# Altium PCB CrashDAQ For Hammond 1554H.PcbDoc (part 1 of 2)
Units mil, origin at the board's own origin, x right, y up, seen from the top; angles counter-clockwise.
Board outline 6580.35 x 4200 mil, 2 copper layers (Top Layer, Bottom Layer); 103 components, 88 nets, 462 pads, 122 vias.
Unrouted connection lines stored in the file: 5.
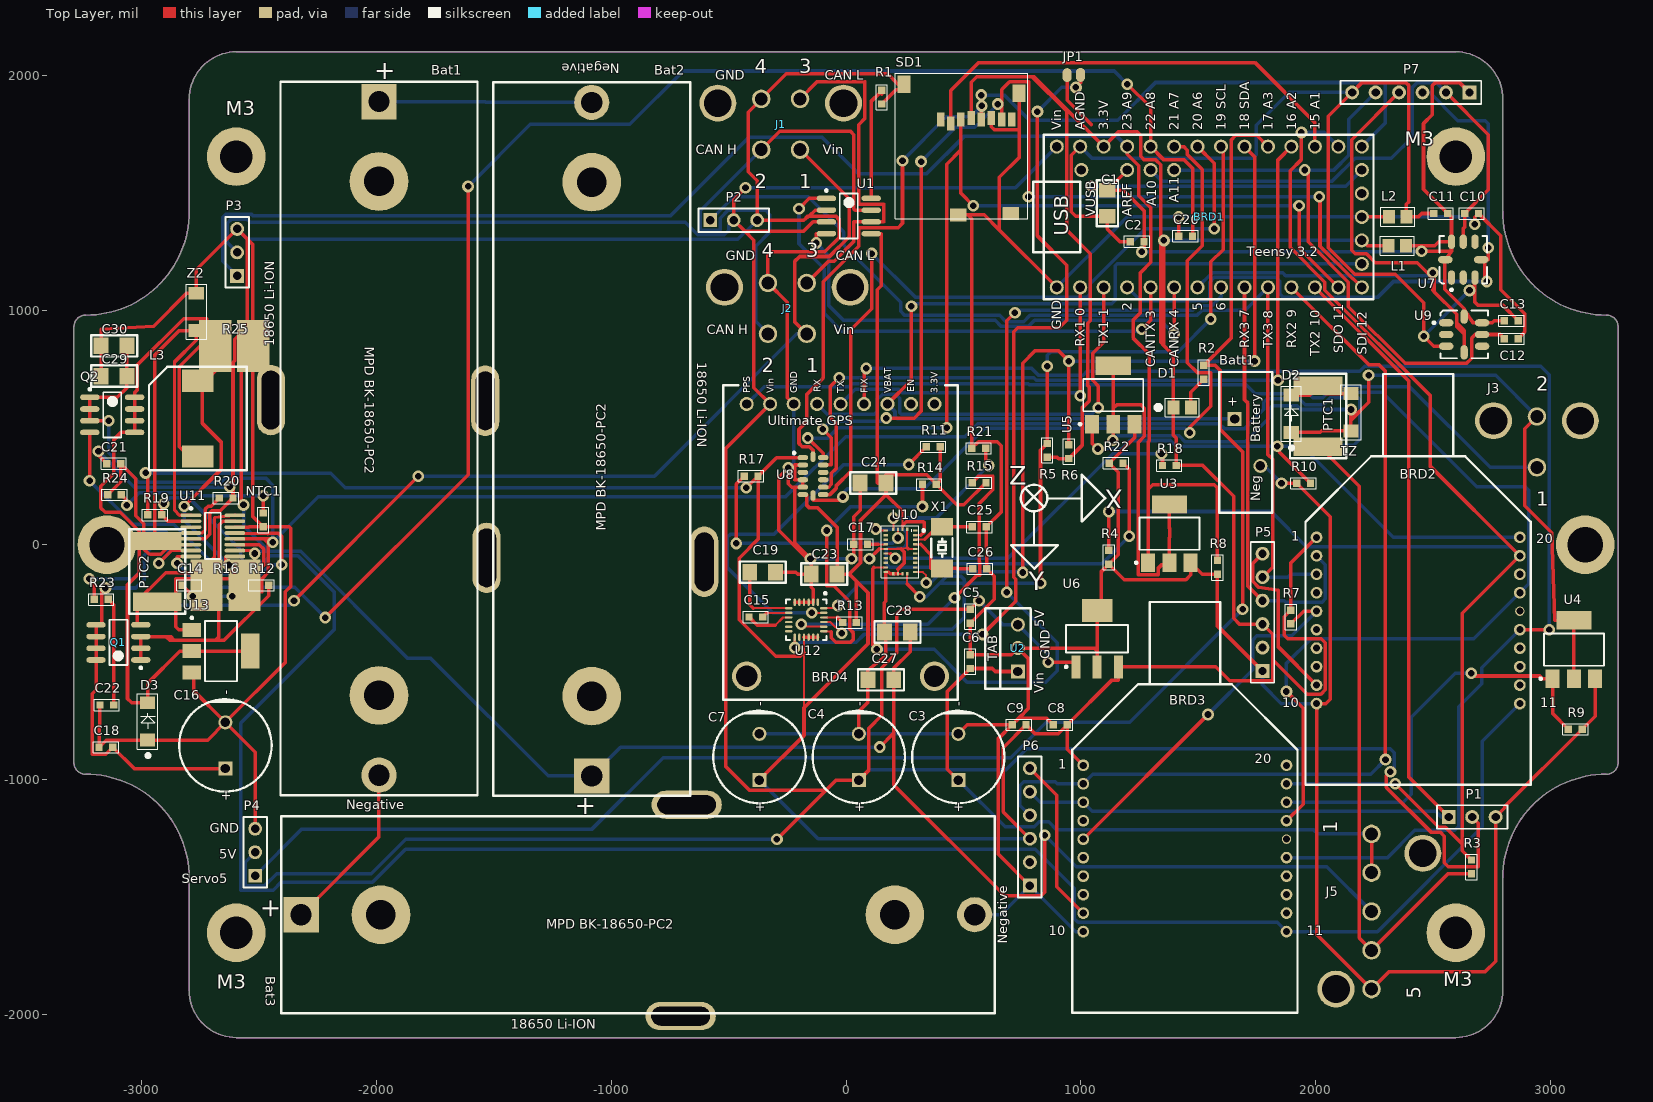
[diagram p0: Top Layer view]
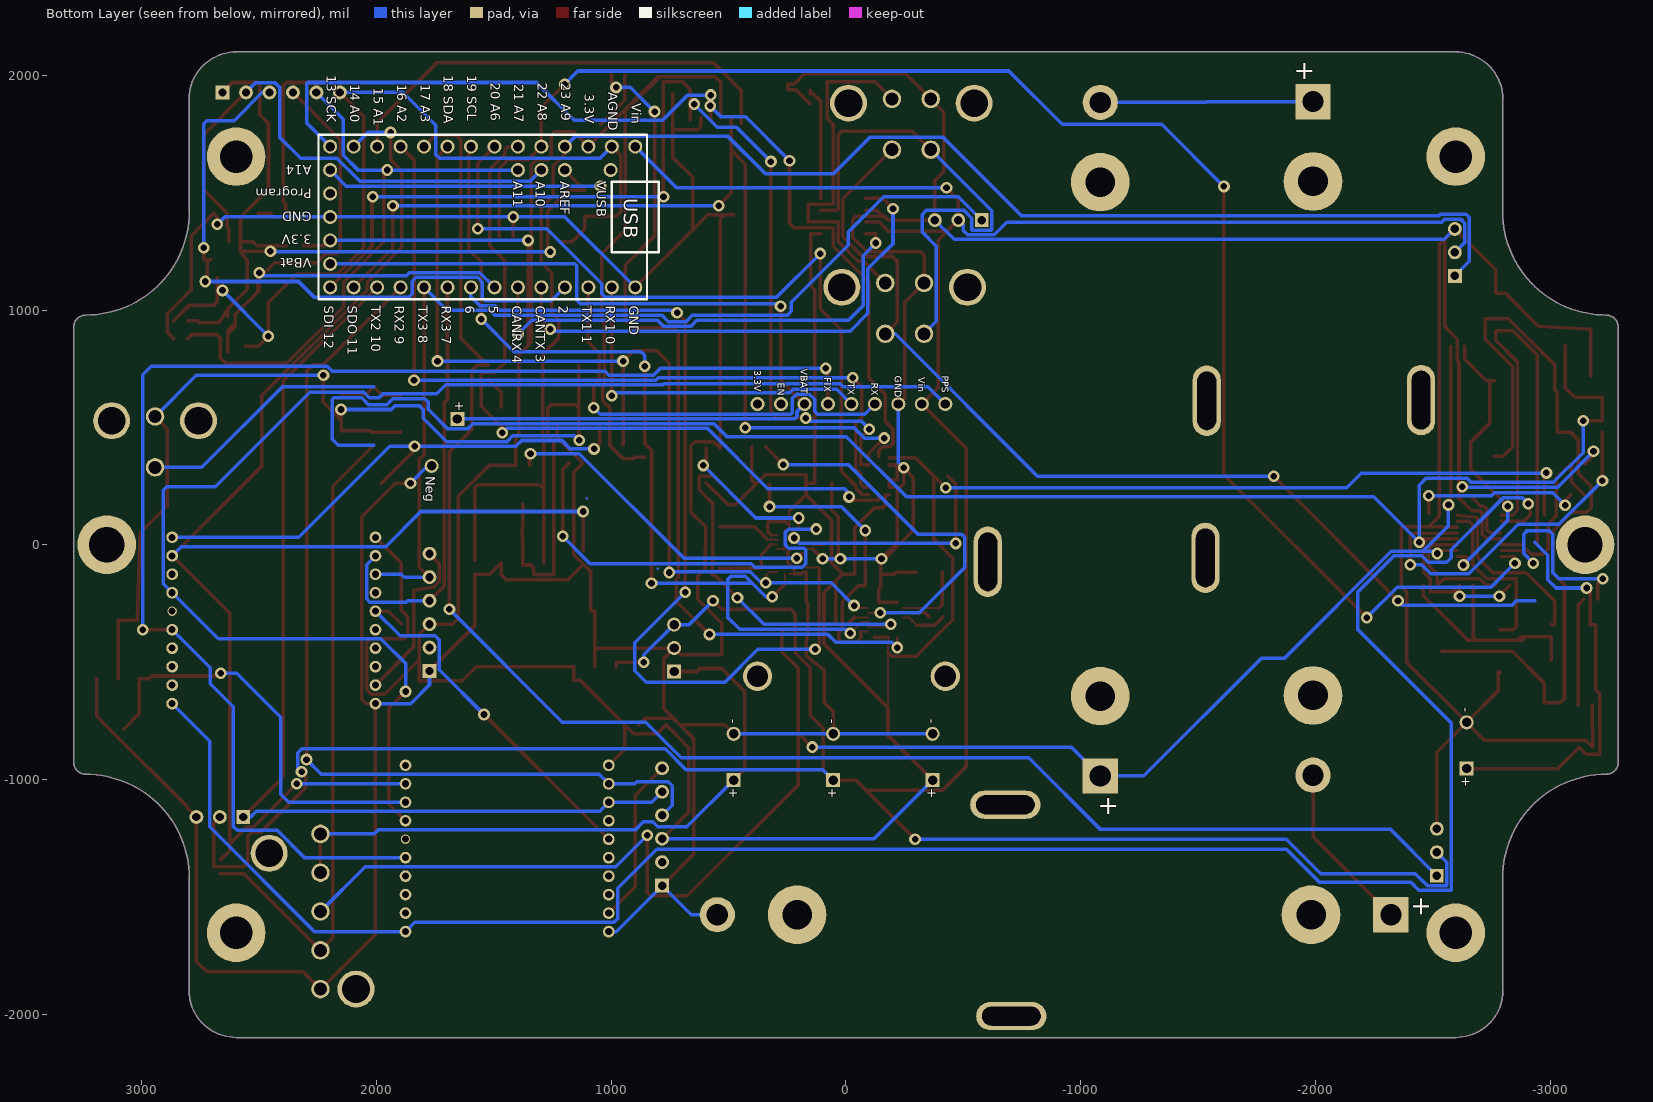
[diagram p1: Bottom Layer view, seen from below]

## Layer stack, top to bottom
Top Solder: solder mask 0.4, Solder Resist, Dk 3.5
Top Layer: signal copper 1.4
Dielectric 1: dielectric 12.6, FR-4, Dk 4.8
Bottom Layer: signal copper 1.4
Bottom Solder: solder mask 0.4, Solder Resist, Dk 3.5

## Board outline
-3240.35,-978.31 cw(c-3240.35,-928.31) -3290.35,-928.31 -3290,-928.31 -3290,928.31 cw(c-3240,928.31) -3240,978.31 ccw(c-3240,1420) -2798.31,1420 -2798.31,1900 -2798.43,1900 cw(c-2598.43,1900) -2598.43,2100 2598.43,2100 cw(c2598.43,1900) 2798.43,1900 2798.31,1900 2798.31,1420 ccw(c3240,1420) 3240,978.31 cw(c3240,928.31) 3290,928.31 3290,-928.31 cw(c3240,-928.31) 3240,-978.31 ccw(c3240,-1420) 2798.31,-1420 2798.31,-1900 2798.43,-1900 cw(c2598.43,-1900) 2598.43,-2100 -2598.78,-2100 cw(c-2598.78,-1900) -2798.78,-1900 -2798.66,-1900 -2798.66,-1420 ccw(c-3240.35,-1420)

## Design rules (kind name [scope] priority, off if disabled: settings)
Clearance [All] p1: gap=5
HoleSize [All] p1: absolutevalues=TRUE maxlimit=250 minlimit=1 maxpercent=80.000 minpercent=20.000
PolygonConnect [All] p1: connectstyle=Relief reliefconductorwidth=10 reliefentries=4 polygonreliefangle="90 Angle" airgapwidth=10
RoomDefinition TeensyCrashDAQ [InComponentClass('TeensyCrashDAQ')] p1: confinementstyle=ConfineIn formatcopy=TRUE lockcomponents=FALSE outline -4418.43,-3668.54 -2418.43,-3668.54 -2418.43,-2668.54 -4418.43,-2668.54
RoomDefinition CrashDAQSensors [InComponentClass('CrashDAQSensors')] p2: confinementstyle=ConfineIn formatcopy=TRUE lockcomponents=FALSE outline -4418.43,-3668.54 -2418.43,-3668.54 -2418.43,-2668.54 -4418.43,-2668.54
RoutingVias [All] p1: holewidth=28 width=50 viastyle="Through Hole" minholewidth=28 minwidth=50 maxholewidth=28 maxwidth=50
SMDNeckDown [All] p1: percent=90.000
SilkToSilkClearance [All] p1: silktosilkclearance=1
SolderMaskExpansion [All] p1: expansion=4
Width [All] p1: maxlimit=50 minlimit=7 preferedwidth=15
28 further rules are at their usual default settings.

## Classes and differential pairs
component class TeensyCrashDAQ: Batt1 BRD1 BRD2 BRD3 C1 C2 C3 C4 C5 C6 C7 C8 C9 D1 D2 J1 J2 J3 J5 L1 L2 P1 P2 P3 P4 P5 P6 PTC1 R1 R2 R3 R4 R5 R6 R7 R8 R9 R10 SD1 U1 U2 U3 U4 U5 U6 Z1
component class CrashDAQSensors: Bat1 Bat2 Bat3 BRD4 C10 C11 C12 C13 C14 C15 C16 C17 C18 C19 C20 C21 C22 C23 C24 C25 C26 C27 C28 C29 C30 D3 JP1 L3 NTC1 P7 PTC2 Q1 Q2 R11 R12 R13 R14 R15 R16 R17 R18 R19 R20 R21 R22 R23 R24 R25 U7 U8 U9 U10 U11 U12 U13 X1 Z2

## Components (designator, comment, footprint, x,y, rotation, side; value= is the part's Value field where it differs from the comment)
Bat1 "18650" "18650 Holder" -1083.66,449.8 r90 top
Bat2 "18650" "18650 Holder" -1990.16,452.76 r270 top
Bat3 "18650" "18650 Holder" -886.81,-1576.77 r0 top
Batt1 "CR1225FV-LF" "Coin Cell with Tabs" 1765.75,335.63 r90 top
BRD1 "Teensy 3.2" Teensy 2197.83,1096.46 r90 top
BRD2 "Xbee 2.4 GHz" Xbee 2004.92,31.5 r0 top
BRD3 "Xbee 900 MHz" Xbee 1010.83,-939.96 r0 top
BRD4 "Adafruit Ultimate GPS" GPS 376.7,679.28 r90 top
C1 "4.7uF" 1206 1113.19,1454.72 r90 top
C2 "0.1uF" 0603 1240.16,1291.34 r0 top
C3 "330uF" "Elec. Cap 5 x 10mm" 478.35,-1002.95 r90 top
C4 "330uF" "Elec. Cap 5 x 10mm" 54.63,-1002.95 r90 top
C5 "0.1uF" 0603 529.53,-305.12 r90 top
C6 "0.1uF" 0603 529.53,-498.03 r270 top
C7 "330uF" "Elec. Cap 5 x 10mm" -369.09,-1002.95 r90 top
C8 "1.0uF" 0603 912.4,-767.72 r0 top
C9 "8.2pF" 0603 737.2,-767.72 r0 top
C10 "1000pF" 0603 2665.35,1411.42 r180 top
C11 "0.1uF" 0603 2534.45,1411.2 r0 top
C12 "1000pF" 0603 2834.65,877.95 r180 top
C13 "0.1uF" 0603 2834.65,954.72 r180 top
C14 "15nF" 0603 -2798.23,-173.23 r0 top
C15 "0.22uF" 0603 -383.86,-308.07 r0 top
C16 "330uF" "Elec. Cap 5 x 10mm" -2644.68,-953.74 r90 top
C17 "1.0uF" 0603 62.01,1.97 r0 top
C18 "0.1uF" 0603 -3153.54,-863.19 r0 top
C19 "4.7uF" 1206 -355.31,-117.13 r0 top
C20 "4700pF" 0603 1446.85,1314.96 r0 top
C21 "0.47uF" 0603 -3120.08,345.47 r0 top
C22 "0.1uF" 0603 -3149.61,-683.07 r0 top
C23 "4.7uF" 1206 -93.5,-125 r0 top
C24 "4.7uF" 1206 115.16,262.8 r0 top
C25 "12 pF" 0603 567.91,75.79 r180 top
C26 "12 pF" 0603 569.88,-102.36 r180 top
C27 "10uF" 1206 148.62,-575.79 r0 top
C28 "10uF" 1206 218.5,-372.05 r0 top
C29 "10uF" 1206 -3119.09,718.5 r0 top
C30 "10uF" 1206 -3119.09,847.44 r0 top
D1 "Red" "0805 Polarized" 1430.12,584.65 r0 top
D2 "CGRA4001-G" "SMA with A and K" 1896.65,478.35 r90 top
D3 "B360A-13-F" "SMA with A and K" -2976.38,-832.68 r90 top
J1 "4 Pos Mini-Fit Jr." "4 POS Vertical MINI-FIT JR" -278.54,1899.61 r0 top
J2 "4 Pos Mini-Fit Jr." "4 POS Vertical MINI-FIT JR" -250,1115.16 r0 top
J3 "39-29-9023" "2 POS Vertical MINI-FIT JR" 2861.22,546.26 r0 top
J5 "Molex 39-30-2050" "5 POS Vert MINI-FIT JR" 2239.17,-1893.7 r90 top
JP1 "Solder Jumper" "Solder Jumper" 980.32,2000 r0 top
L1 "80 Ohms" 0805 2350.39,1273.62 r180 top
L2 "80 Ohms" 0805 2348.43,1397.64 r0 top
L3 "8.2 uH" "Inductor - 1045" -2970.47,316.93 r0 top
NTC1 "10k" 0603 -2483.27,105.32 r90 top
P1 "Header 3" HDR1X3 2567.91,-1160.43 r0 top
P2 "Header 3" HDR1X3 -578.74,1382.87 r0 top
P3 "Header 3" HDR1X3 -2594.49,1145.67 r90 top
P4 "Header 3" HDR1X3 -2517.72,-1410.43 r90 top
P5 "Header 6" HDR1X6 1774.61,-538.39 r90 top
P6 "Header 6" HDR1X6 783.46,-1452.76 r90 top
P7 "Header 6" HDR1X6 2656.5,1927.17 r180 top
PTC1 "750mA" 2920 2011.81,548.23 r90 top
PTC2 "750mA" 2920 -2935.04,-114.17 r90 top
Q1 "IRF9328" SOIC-8 -3100.39,-416.34 r180 top
Q2 "IRF9328" SOIC-8 -3126.97,553.15 r0 top
R1 "4.7k" 0603 152.56,1907.48 r90 top
R2 "500" 0603 1524.61,734.25 r90 top
R3 "180k" 0603 2665.35,-1373.03 r90 top
R4 "32.4k" 0603 1120.08,-53.15 r90 top
R5 "4.7k" 0603 857.28,401.57 r270 top
R6 "4.7k" 0603 949.8,396.65 r270 top
R7 "4.7k" 0603 1895.67,-308.07 r90 top
R8 "32.4k" 0603 1582.68,-96.46 r90 top
R9 "32.4k" 0603 3107.28,-786.42 r180 top
R10 "32.4k" 0603 1949.8,261.81 r0 top
R11 "10k" 0603 372.05,417.32 r0 top
R12 "4.7k" 0603 -2490.16,-173.23 r0 top
R13 "10k" 0603 14.76,-331.69 r0 top
R14 "10k" 0603 355.32,256.89 r0 top
R15 "10k" 0603 566.93,263.78 r0 top
R16 "0.04" 2818 -2644.19,-173.23 r0 top
R17 "10k" 0603 -404.53,292.32 r0 top
R18 "10k" 0603 1377.95,337.6 r0 top
R19 "32.4k" 0603 -2945.87,126.97 r180 top
R20 "309k" 0603 -2641.73,198.82 r0 top
R21 "4.7k" 0603 565.94,410.43 r0 top
R22 "4.7k" 0603 1150.59,347.44 r0 top
R23 "6.04k" 0603 -3173.23,-233.27 r0 top
R24 "32.4k" 0603 -3117.13,212.6 r0 top
R25 "0.025" 2818 -2606.3,846.46 r0 top
SD1 "microSD" "SD Card Holder" 219.49,1389.76 r0 top
U1 "MCP2562" SOIC-8 11.81,1400.59 r0 top
U2 "OKI-78SR" 78xx 732.28,-540.35 r90 top
U3 "NCV8403ASTT1G" ONSC-SOT-223-4-318E-04_V 1377.95,47.24 r90 top
U4 "NCV8403ASTT1G" ONSC-SOT-223-4-318E-04_V 3101.38,-446.85 r90 top
U5 "NCV8403ASTT1G" ONSC-SOT-223-4-318E-04_V 1138.78,637.8 r90 top
U6 "MCP1825ST-3302E/DB" SOT-223-DB3_M 1069.88,-400.59 r90 top
U7 "ADXL001-250" ADI-E-8-1_V 2629.92,1214.57 r90 top
U8 "ADXL375" ADI-CC-14-1_V -140.75,292.32 r0 top
U9 "ADXL001-250" ADI-E-8-1_V 2633.86,895.67 r0 top
U10 "BNO055" "BNO055 LGA" 232.28,-29.53 r270 top
U11 "LTC4006EGN-2" LT-GN-16_N -2697.83,37.4 r0 top
U12 "LSM9DS0 IMU" "LGA 4x4x1 mm 24-lead" -169.29,-319.88 r0 top
U13 "NCV8403ASTT1G" ONSC-SOT-223-4-318E-04_V -2663.39,-453.74 r0 top
X1 "32.768KHz" "XTAL 2 pad" 408.46,-101.38 r90 top
Z1 "SMA6J" SMA 2151.57,643.7 r270 top
Z2 "SMA6J" SMA -2768.7,912.4 r90 top

## Footprints (in the part's own frame and the unit in brackets; to place one, negate y for a bottom-side part, rotate by r counter-clockwise, add the part's x,y. Pads: shape width x height; smd on the part's side, far side on the other; paste and mask are expansions set on the pad)
"2 POS Vertical MINI-FIT JR" [mm] "Vertical Header 39-29-9023"
  round 4 hole 3: 0(-2.6,-0.46) 0(6.8,-0.46)
  round 2 hole 1.4: 1(2.1,-5.5) 2(2.1,0)
"4 POS Vertical MINI-FIT JR" [mm] "Vertical Header"
  round 4 hole 3: 0(-6.8,-0.46) 0(6.8,-0.46)
  round 2 hole 1.4: 1(2.1,-5.5) 2(-2.1,-5.5) 3(2.1,0) 4(-2.1,0)
"5 POS Vert MINI-FIT JR" [mm] "Molex 5 Pos Vertical Header with Pegs 39-30-2050"
  round 4 hole 3: 0(0,3.85) 0(14.7,-5.55)
  round 2 hole 1.4: 1(16.8,0) 2(12.6,0) 3(8.4,0) 4(4.2,0) 5(0,0)
78xx [mil] "Voltage regulator based on LM7805"
  rect 60x60 hole 40: 1(0,0)
  round 60 hole 40: 2(100,0) 3(200,0)
  silkscreen extent -73,-55 269,139
0603 [mm] "0603 SMP Component with outline"
  rect 0.8x0.8 smd: 1(-0.75,0) 2(0.75,0)
  silkscreen extent -1.39,-0.61 1.36,0.61
0805 [mm]
  rect 1.3x1.5 smd: 1(-0.899,0) 2(1.001,0)
  silkscreen extent -1.8,-1.02 1.9,1.02
"0805 Polarized" [mm] "Polarized 0805 with Pin 1 as Anode (+)"
  rect 1.3x1.5 smd: 1(-0.899,0) 2(1.001,0)
  silkscreen extent -2.79,-0.99 1.88,0.99
1206 [mm]
  rect 1.6x1.8 smd: 1(-1.4,0) 2(1.4,0)
  silkscreen extent -2.47,-1.16 2.5,1.15
2818 [mil] "Power Metal Strip® Resistors, High Power (7 W)  Low Value (down to 0.001 O), Surface Mount"
  rect 138x220 smd: 1(-81,0) 2(81,0)
2920 [mm] "Littlefuse PolyFues SMT 2920L Series"
  rect 2x5.3 smd: 1(-3.3,0) 2(3.3,0)
  silkscreen extent -4.57,-3.05 4.57,3.05
"18650 Holder" [mil] "MPD BK-18650-PC2 Single LI-ION Cell Holder"
  round 250 hole 126: 0(-1095,0) 0(1095,0)
  rect 150x150 hole 90: 1(-1435,0)
  round 150 hole 90: 2(1435,0)
  silkscreen extent -1520,-420 1520,420
ADI-CC-14-1_V [mm] "QFN, 14-Leads, Body 5x3mm, Pitch 0.8mm"
  oval 1.145x0.55 smd: 1(-1.098,2) 2(-1.098,1.2) 3(-1.098,0.4) 4(-1.098,-0.4) 5(-1.098,-1.2) 6(-1.098,-2) 8(1.098,-2) 9(1.098,-1.2) 10(1.098,-0.4) 11(1.098,0.4) 12(1.098,1.2) 13(1.098,2)
  oval 0.55x1.145 smd: 7(0,-2.097) 14(0,2.097)
  silkscreen extent -2.18,2.38 -1.93,2.62, body extent -1.5,-2.5 1.5,2.5, height 1
ADI-E-8-1_V [mm] "LCC, 8-Leads, Body 5x5mm, Pitch 1.27mm"
  oval 1.56x0.78 smd: 1(-1.94,1.27) 2(-1.94,0) 3(-1.94,-1.27) 5(1.94,-1.27) 6(1.94,0) 7(1.94,1.27)
  oval 0.78x1.56 smd: 4(0,-1.94) 8(0,1.94)
  silkscreen extent -3.39,-2.58 2.58,2.58, body extent -2.5,-2.5 2.5,2.5, height 2.21
"BNO055 LGA" [mm] "BOSCH BNO055  Intelligent 9-axis absolute orientation sensor"
  rect 0.25x0.475 smd: 1(-2.286,1.594) 6(-2.286,-1.594) 7(-1.786,-1.594) 8(-1.286,-1.594) 9(-0.786,-1.594) 10(-0.286,-1.594) 11(0.214,-1.594) 12(0.714,-1.594) 13(1.214,-1.594) 14(1.714,-1.594) 15(2.214,-1.594) 20(2.214,1.58) 21(1.714,1.58) 22(1.214,1.58) 23(0.714,1.58) 24(0.214,1.58) 25(-0.286,1.58) 26(-0.786,1.58) 27(-1.286,1.58) 28(-1.786,1.58)
  rect 0.375x0.25 smd paste+0: 2(-2.413,0.719)
  rect 0.375x0.25 smd: 3(-2.413,0.219) 4(-2.413,-0.281) 5(-2.413,-0.781) 16(2.413,-0.781) 17(2.413,-0.281) 18(2.413,0.219) 19(2.413,0.719)
  silkscreen extent -2.82,-2.08 2.85,2.62
"Coin Cell with Tabs" [mil] "Renata Two pins vertical mounting"
  rect 60x60 hole 40: 1(200,110.24)
  round 60 hole 40: 2(0,0)
  silkscreen extent -200,-50 400,175
"Elec. Cap 5 x 10mm" [mil] "2 lead polarized Radial Capacitor with 5 mm lead spacing and 10 mm diameter can"
  rect 60x60 hole 40: 1(0,0)
  round 60 hole 40: 2(196.85,0)
  silkscreen extent -98,-197 295,197
GPS [mil] "Adafruit Ultimate GPS Breakout"
  round 125 hole 90: 0(-1240,0) 0(-1240,800)
  round 60 hole 40: 1(-80,0) 2(-80,100) 3(-80,200) 4(-80,300) 5(-80,400) 6(-80,500) 7(-80,600) 8(-80,700) 9(-80,800)
  silkscreen extent -1340,-100 0,900
HDR1X3 [mm] "Connector; Header; 3 Position"
  rect 1.5x1.5 hole 0.9: 1(0,0)
  round 1.5 hole 0.9: 2(2.54,0) 3(5.08,0)
  silkscreen extent -1.27,-1.27 6.35,1.27
HDR1X6 [mm] "Connector; Header; 6 Position"
  rect 1.5x1.5 hole 0.9: 1(0,0)
  round 1.5 hole 0.9: 2(2.54,0) 3(5.08,0) 4(7.62,0) 5(10.16,0) 6(12.7,0)
  silkscreen extent -1.27,-1.27 13.97,1.27
"Inductor - 1045" [mm] "Wurth WE-PDF SMD Shielded Power Inductor P/N: 7447797820"
  rect 3.4x2.4 smd: 1(5.3,1.5) 2(5.3,9.7)
  silkscreen extent 0,0 10.6,11.2
"LGA 4x4x1 mm 24-lead" [mm] "QFN, 24-Leads, Body 4.1x4.1mm, Pitch 0.5mm,  IPC High Density"
  oval 0.25x0.8 smd: 1(1.25,1.9) 2(0.75,1.9) 3(0.25,1.9) 4(-0.25,1.9) 5(-0.75,1.9) 6(-1.25,1.9) 13(-1.25,-1.9) 14(-0.75,-1.9) 15(-0.25,-1.9) 16(0.25,-1.9) 17(0.75,-1.9) 18(1.25,-1.9)
  oval 0.8x0.25 smd: 7(-1.9,1.25) 8(-1.9,0.75) 9(-1.9,0.25) 10(-1.9,-0.25) 11(-1.9,-0.75) 12(-1.9,-1.25) 19(1.9,-1.25) 20(1.9,-0.75) 21(1.9,-0.25) 22(1.9,0.25) 23(1.9,0.75) 24(1.9,1.25)
  silkscreen extent -2.2,-2.2 2.2,2.97, body extent -2.05,-2.05 2.05,2.05, height 0.8
LT-GN-16_N [mm] "SOP, 16-Leads, Body 5x4mm, Pitch 0.635mm, IPC Medium Density"
  oval 2.25x0.4 smd: 1(-2.375,2.222) 2(-2.375,1.587) 3(-2.375,0.952) 4(-2.375,0.317) 5(-2.375,-0.318) 6(-2.375,-0.953) 7(-2.375,-1.588) 8(-2.375,-2.223) 9(2.375,-2.223) 10(2.375,-1.588) 11(2.375,-0.953) 12(2.375,-0.318) 13(2.375,0.317) 14(2.375,0.952) 15(2.375,1.587) 16(2.375,2.222)
  silkscreen extent -2.5,-2.5 0.85,3.1, body extent -2,-2.5 2,2.5, height 1.75
ONSC-SOT-223-4-318E-04_V [mm] "SOT223, 4-Leads, Body 6.5x3.5mm, Pitch 2.3mm"
  rect 2x1.5 smd: 1(-3.15,2.3) 2(-3.15,0) 3(-3.15,-2.3)
  rect 2x3.8 smd: 4(3.15,0)
  silkscreen extent -3.27,-3.25 1.75,3.72, body extent -1.75,-3.25 1.75,3.25, height 1.75
"SD Card Holder" [mm] "Amphenol 101-00660-68-6 CONN MICRO SD CARD PUSH-PUSH R/A"
  rect 0.8x1.5 smd: 1(4.66,10.7) 2(5.76,10.3) 3(6.86,10.7) 4(7.96,10.9) 5(9.06,10.7) 6(10.16,10.9) 7(11.26,10.7) 8(12.36,10.7)
  rect 1.4x1.9 smd: 6(0.7,14.55) 6(13.15,13.55)
  rect 1.8x1.4 smd: 6(6.55,0.4) 9(12.25,0.527)
  silkscreen extent -0.25,0 14.1,15.75
SMA [mil] "SMA with outline"
  rect 55x65 smd: 1(0,0) 2(159,0)
  silkscreen extent -38,-44 197,43
"SMA with A and K" [mil] "SMA with outline and Cathode Bar on Pin 2"
  rect 55x65 smd: 1(0,0) 2(159,0)
  silkscreen extent -71,-44 197,43
SOIC-8 [mm]
  oval 2.1x0.6 smd: 1(-2.425,1.905) 2(-2.425,0.635) 3(-2.425,-0.635) 4(-2.425,-1.905) 5(2.425,-1.905) 6(2.425,-0.635) 7(2.425,0.635) 8(2.425,1.905)
  silkscreen extent -2.55,-2.45 0.97,2.88
"Solder Jumper" [mm]
  rrect100% 1x1.5 smd: 1(-0.974,0.025) 2(0.475,0.05)
SOT-223-DB3_M [mm] "SOT223, 4-Leads, Body 6.5x3.5mm, Pitch 2.3mm, Lead Span 7mm, IPC Low Density"
  rect 2.5x1 smd: 1(-3.05,2.3) 2(-3.05,0) 3(-3.05,-2.3)
  rect 2.5x3.3 smd: 4(3.05,0)
  silkscreen extent -3.17,-3.35 1.5,3.47, body extent -1.85,-3.35 1.85,3.35, height 1.8
Teensy [mil] "32 bit Arduino Compatible Microcontroller www.pjrc.com/teensy"
  round 60 hole 40: 1(0,0) 2(0,100) 3(0,200) 4(0,300) 5(0,400) 6(0,500) 7(0,600) 8(0,700) 9(0,800) 10(0,900) 11(0,1000) 12(0,1100) 13(0,1200) 14(0,1300) 15(100,0) 16(200,0) 17(300,0) 18(400,0) 19(500,0) 20(600,0) 21(600,100) 22(600,200) 23(600,300) 24(600,400) 25(600,500) 26(600,600) 27(600,700) 28(600,800) 29(600,900) 30(600,1000) 31(600,1100) 32(600,1200) 33(600,1300) 34(500,1195) 35(500,1000) 36(500,900) 37(500,800)
  silkscreen extent -50,-50 650,1400
Xbee [mil] "Digi XB radio Board"
  round 50 hole 30: 1(0,0) 2(0,-78.74) 3(0,-157.48) 4(0,-236.22) 5(0,-314.96) 6(0,-393.7) 7(0,-472.44) 8(0,-551.18) 9(0,-629.92) 10(0,-708.66) 11(866.14,-708.66) 12(866.14,-629.92) 13(866.14,-551.18) 14(866.14,-472.44) 15(866.14,-393.7) 17(866.14,-236.22) 18(866.14,-157.48) 19(866.14,-78.74) 20(866.14,0)
  round 40 hole 30: 16(866.14,-314.96)
  silkscreen extent -47,-1054 913,696
"XTAL 2 pad" [mm] "Digikey XC1659CT-ND"
  rect 1.9x2.4 smd: 1(0,0) 2(4.5,0)
  silkscreen extent 1.19,-1.14 3.28,1.14

## Part data
Bat1 Bat2 Bat3: library part Battery, "MPD one 18650 LI-ION Cell Holder BK-1850-PC2"
Batt1: library part "CR2032 Battery Holder", "Coin Cell Battery 3V 2-PIN VERT 48mAh 12.5 x 2.5mm"
BRD1: library part Teensy, "32 Bit Arduino-Compatible Microcontroller"
BRD2 BRD3: library part Xbee
BRD4: library part "GPS - Adafruit"
C1 C19 C23 C24: library part Cap, "4.7µF ±10% 50V X7R Ceramic Capacitor -55°C ~ 125°C Surface Mount, MLCC 1206"
C2 C5 C6 C11 C13 C18 C22: library part Cap, "0.10µF ±10% 50V X7R Ceramic Capacitor -55°C ~ 125°C Surface Mount, MLCC 0603 (1608 Metric) 0.063\" L x 0.031\" W (1.60mm x 0.80mm)"
C3 C4 C7 C16: library part "SMD Elec", "CAP ALUM 330UF 20% 50V RADIAL"
C8 C17: library part Cap, "1µF ±10% 10V X5R Ceramic Capacitor -55°C ~ 85°C Surface Mount, MLCC 0603 (1608 Metric) 0.063\" L x 0.031\" W (1.60mm x 0.80mm)"
C9: library part Cap, "8.2pF ±0.5pF 50V C0G, NP0 Ceramic Capacitor -55°C ~ 125°C Surface Mount, MLCC 0201 (0603 Metric) 0.024\" L x 0.012\" W (0.60mm x 0.30mm)"
C10 C12: library part Cap, "1000pF ±10% 50V X7R Ceramic Capacitor -55°C ~ 125°C Surface Mount, MLCC 0603 (1608 Metric) 0.063\" L x 0.031\" W (1.60mm x 0.80mm)"
C14: library part Cap, "CAP CER 0.015UF 50V X7R 0603"
C15: library part Cap, "0.22µF ±10% 25V X7R Ceramic Capacitor -55°C ~ 125°C Surface Mount, MLCC 0603 (1608 Metric) 0.063\" L x 0.031\" W (1.60mm x 0.80mm)"
C20: library part Cap
C21: library part Cap, "0.47µF ±10% 25V X7R Ceramic Capacitor -55°C ~ 125°C Surface Mount, MLCC 0603 (1608 Metric) 0.063\" L x 0.031\" W (1.60mm x 0.80mm)"
C25 C26: library part Cap, "CAP CER 12PF 50V NP0 0603"
C27 C28 C29 C30: library part Cap, "10µF -20%, +80% 16V Y5V (F) Ceramic Capacitor -30°C ~ 85°C Surface Mount, MLCC 120"
D1: library part "LED - SMD", "LED RED DIFFUSED 0805 SMD"
D2: library part Diode, "DIODE GEN PURP 50V 1A DO214AC"
D3: library part "Schottky Diode", "DIODE SCHOTTKY 60V 3A SMA"
J1 J2: library part "4 Pos Header Vert", "CONN HEADER 4POS 4.2MM VERT TIN"
J3: library part "2 Pos Header Vert", "2 Positions Header, Shrouded Connector Through Hole Tin"
J5: library part "5 Pos Header Vert", "Molex Mint Fit Jr 5 CKT VERT HEADER"
L1 L2: library part "Ferrite Bead", "Ferrite Bead 80ohms 100MHz 5A Monolithic 0805 SMD"
L3: library part Inductor, "FIXED IND 8.2UH 5.05A 28.6 MOHM"
NTC1: library part NTC, "THERMISTOR 10K OHM NTC 0603 SMD"
P1 P2 P3 P4: "Header, 3-Pin"
P5 P6 P7: "Header, 6-Pin"
PTC1 PTC2: library part PTC, "PTC RESETBL 60V 750MA SMD 2920"
Q1 Q2: library part "IRF9328 P-FET", "MOSFET P-CH 30V 12A 8-SOIC"
R1 R5 R6 R7 R12 R21 R22: library part "Chip Resistor", "4.7k Ohm ±1% 0.1W, 1/10W Surface Mount Resistor Thick Film ±100ppm/°C 0603"
R2 R3 R20: library part "Chip Resistor"
R4 R8 R9 R10 R19 R24: library part "Chip Resistor", "32.4k Ohm ±1% 0.1W, 1/10W Surface Mount Resistor Thick Film ±100ppm/°C 0603"
R11 R13 R14 R15 R17 R18: library part "Chip Resistor", "10k Ohm ±1% 0.1W, 1/10W Surface Mount Resistor Thick Film ±100ppm/°C 0603"
R16: library part "Chip Resistor", "0.04 Ohm ±1% 7W Surface Mount Resistor Metal Element ±75ppm/°C 2818"
R23: library part "Chip Resistor", "6.04k Ohm ±1% 0.1W, 1/10W Surface Mount Resistor Thick Film ±100ppm/°C 0603"
R25: library part "Chip Resistor", "0.025 Ohm ±1% 7W Surface Mount Resistor Metal Element ±75ppm/°C 2818"
SD1: library part "SD Card Holder", "CONN MICRO SD CARD PUSH-PUSH R/A"
U1: library part MCP2551-I/P, "High-Speed CAN Transceiver, 8-Pin PDIP, Industrial Temperature"
U2: library part 7805, "5V DC/DC Converter (7805 replacement)"
U3 U4 U5 U13: "Self-Protected Low Side Driver with Temperature and Current Limit, 4-Pin SOT-223, Pb-Free, Tape and Reel"
U6: "500 mA, Low Voltage, Low Quiescent Current LDO Regulator, 3-Pin SOT-223, Extended Temperature, Tape and Reel"
U7 U9: library part AD22279-A, "Single-Axis, High-g, iMEMS(R) Accelerometers with Analog Output, 400 Hz BW, Industrial, 8-pin LCC, Reel"
U8: library part ADXL343BCCZ, "3-Axis, +/-2 g / +/-4 g / +/-8 g / +/-16 g Digital MEMS Accelerometer with Digital Output, 1.6 KHz BW, Industrial, 14-pin LGA, Tray"
U10: "IMUs - Inertial Measurement Units Absolute Orientation 9-Axis Sensor"
U11: "4 A, High Efficiency, Standalone Li-Ion Battery Charger, 6 to 28 V Vin, 16-pin SOP (GN-16), -40 to 85 degC"
X1: library part "Crystal Oscillator", "Crystal 32.7680kHz 20ppm 12.5pF 70 kOhm -40°C - 85°C Surface Mount 2-SMD"
Z1 Z2: library part "Zener - Bidirectional", "TVS DIODE 15VWM 24.4VC SMA"

## Free pads (board coordinates)
  round 250 hole 150: 0(-3149.61,0) 0(3149.61,0)
  round 250 hole 137.8: 0(-2598.43,-1653.54) 0(-2598.43,1653.54) 0(2598.42,-1653.54) 0(2598.42,1653.54)
  oval 120x300 hole 80 slot 250 at 90 deg unplated: 0(-2450.79,616.14) 0(-1537.4,613.19) 0(-1531.5,-56.1) 0(-604.33,-72.84)
  oval 300x120 hole 80 slot 250 at 0 deg unplated: 0(-704.73,-2008.86) 0(-679.13,-1108.27)
  round 0 all layers, no hole paste+0 mask+0: 1(875,153.54) 1(990.16,258.86)

## Via types
v1: diameter 50, hole 28, Top Layer to Bottom Layer, 122 vias

## Nets (pads, with @x,y where several pads share a name; then routed paths per layer and width w, separated by ;. In a path a pad name is that pad's centre, name@x,y a point inside that pad or via, vN(x,y) a via of type N, cw(c..) or ccw(c..) an arc to the next point about the centre after c; other vN are vias at no path point)
3V3: BRD1.16 BRD1.31 BRD2.1 BRD3.1 C7.1 C8.2 C9.2 C23.2 C24.2 D1.1 L1.2 P5.3 P6.3 R5.2 R6.2 R7.2 R11.2 R13.2 R14.2 R15.2 R17.2 R18.2 R19.2 SD1.4 U1.5 U6.3 U8.1 U8.6 U10.3 U10.28 U12.15 U12.16 U12.17 U12.18 | length 20316.3
  Top Layer w8.86: -179.13,-695.25 -179.13,-460.36 U12.15@-179.13,-394.69 ; U10.3@240.89,65.47 240.89,82.53 240.89,141.82 ; U10.28@294.48,40.79 319.07,40.79
  Top Layer w15: v1(-2984.93,305.96) -2975.39,296.42 R19.2@-2975.39,126.97 ; v1(-424.87,242.46) R17.2@-375,292.32 ; C7.1@-369.1,-1002.95 -179.13,-812.99 -179.13,-695.25 93.57,-422.54 93.57,-204.54 44.29,-155.26 ; U8.6@-183.96,213.58 -168.43,213.58 -168.43,168.96 -155.93,156.46 -119.93,156.46 -38.39,74.92 C23.2@-38.39,-125 14.03,-125 ; U8.1@-183.96,371.06 -296.26,371.06 R17.2@-375,292.32 ; -179.13,-460.36 -194.81,-476.04 -298.93,-476.04 -455.43,-319.54 -455.43,-57.04 -375,23.38 R17.2@-375,292.32 ; U12.15@-179.13,-394.69 U12.16@-159.45,-394.69 U12.17@-139.76,-394.69 U12.18@-120.08,-394.69 ; R13.2@44.29,-331.69 44.29,-155.26 ; U1.5@107.28,1325.59 148.94,1325.59 150.07,1324.46 150.07,1102.75 133.57,1086.25 133.57,263.79 134.57,262.79 C24.2@170.27,262.79 ; 240.89,82.53 256.57,98.21 329.32,98.21 332.57,94.96 332.57,54.29 319.07,40.79 ; 240.89,141.82 170.27,212.44 ; R11.2@401.57,417.32 401.57,273.62 R14.2@384.84,256.89 ; SD1.4@532.87,1818.9 532.87,1969.76 556.57,1993.46 794.07,1993.46 794.4,1993.13 ; R15.2@596.46,263.78 502.13,169.46 472.28,169.46 R14.2@384.84,256.89 ; P6.3@783.46,-1252.76 669.57,-1138.87 669.57,-864.88 C9.2@766.73,-767.72 805.06,-806.04 903.6,-806.04 C8.2@941.93,-767.72 ; R5.2@857.28,372.05 900.57,372.05 905.5,367.12 R6.2@949.8,367.12 1005.57,422.9 1005.57,582.46 1035.57,612.46 1035.57,672.46 1030.57,677.46 1030.57,943.46 1040.57,953.46 1040.57,1240.46 940.33,1340.7 940.33,1847.2 794.4,1993.13 ; BRD3.1@1010.83,-939.96 941.93,-871.06 C8.2@941.93,-767.72 ; v1(1354.57,1296.46) 1354.57,848.46 ; BRD2.1@2004.92,31.5 1895.67,-77.76 R7.2@1895.67,-278.54 1866.57,-307.64 1866.57,-386.54 1881.57,-401.54 2025.57,-401.54 2042.57,-418.54 2042.57,-618.54 2023.57,-637.54 1964.89,-637.54 1817.57,-490.23 ; BRD1.16@2197.83,1296.46 2220.67,1273.62 L1.2@2310.99,1273.62 ; 14.03,-125 61.57,-77.46 61.57,103.74 170.27,212.44 ; 14.03,-125 44.29,-155.26 ; 170.27,212.44 C24.2@170.27,262.79 ; C24.2@170.27,262.79 170.27,298.46 343.28,298.46 R14.2@384.84,256.89 ; 794.4,1993.13 801.16,1993.13 BRD1.31@1097.83,1696.46 1161.83,1760.46 1238.83,1760.46 1255.33,1743.96 1255.33,1654.46 1270.33,1639.46 1320.07,1639.46 1340.57,1618.96 1340.57,862.46 1354.57,848.46 ; C8.2@941.93,-767.72 1131.1,-578.54 1160.43,-577.54 U6.3@1160.43,-520.67 1160.43,-520.54 1575.57,-520.54 1635.57,-580.54 1816.57,-580.54 1817.57,-579.54 1817.57,-490.23 ; 1354.57,848.46 1394.72,808.31 D1.1@1394.72,584.65 1394.72,467.22 1407.48,454.46 R18.2@1407.48,337.6 1520.43,337.6 1651.57,206.46 1651.57,-313.39 1676.57,-338.39 P5.3@1774.61,-338.39 1817.57,-381.35 1817.57,-490.23
  Bottom Layer w15: v1(-2984.93,305.96) -2982.93,303.96 -2195.43,303.96 -2133.93,242.46 v1(-424.87,242.46) ; C7.1@-369.1,-1002.95 -119.29,-1252.76 P6.3@783.46,-1252.76 ; v1(1354.57,1296.46) BRD1.16@2197.83,1296.46
5V0: BRD1.33 BRD4.8 C4.1 C5.2 P1.2 P2.2 P3.2 P4.2 U1.3 U2.3 U6.1 | length 15231.8
  Top Layer w15: v1(-428.43,1520.46) -478.74,1470.14 P2.2@-478.74,1382.87 -432.32,1336.46 ; v1(-294.43,-1255.54) -84.43,-1045.54 ; U1.3@-83.66,1375.59 -140.74,1375.59 -179.88,1336.46 -432.32,1336.46 ; v1(566.57,-238.54) C5.2@529.53,-275.59 235.53,-275.59 215.57,-295.54 215.57,-460.03 151.57,-524.03 151.57,-727.54 97.57,-781.54 97.57,-960.01 C4.1@54.63,-1002.95 -41.84,-1002.95 -84.43,-1045.54 ; v1(861.57,-500.54) 979.33,-500.54 U6.1@979.33,-520.67 ; v1(2319.57,-967.54) 2302.57,-984.54 2302.57,-1034.54 2492.57,-1224.54 2531.57,-1224.54 2548.92,-1241.89 2548.92,-1356.04 2565.42,-1372.54 2693.57,-1372.54 2694.57,-1371.54 2694.57,-1187.1 P1.2@2667.91,-1160.43 ; -432.32,1336.46 -392.93,1297.06 -392.93,668.91 BRD4.8@-323.3,599.28 -513.43,409.15 -513.43,-944.54 -412.43,-1045.54 -84.43,-1045.54
  Bottom Layer w15: P3.2@-2594.49,1245.67 -2636.52,1287.7 -2636.52,1369.61 -2618.43,1387.7 -2552.43,1387.7 -2539.19,1374.46 -685.43,1374.46 -631.82,1320.85 -518.43,1320.85 -500.43,1338.85 -500.43,1361.19 P2.2@-478.74,1382.87 ; P4.2@-2517.72,-1310.43 -2559.74,-1352.46 -2559.74,-1451.14 -2558.43,-1452.46 -2477.43,-1452.46 -2426.51,-1401.54 -2022.43,-1401.54 -1876.43,-1255.54 v1(-294.43,-1255.54) ; v1(-428.43,1520.46) 721.83,1520.46 BRD1.33@897.83,1696.46 ; C4.1@54.63,-1002.95 99.04,-958.54 681.57,-958.54 770.57,-869.54 2319.07,-869.54 2336.57,-887.04 2336.57,-950.54 v1(2319.57,-967.54) ; v1(566.57,-238.54) 668.38,-340.35 U2.3@732.28,-340.35 861.57,-469.64 v1(861.57,-500.54)
12V0: C14.1 C29.2 C30.2 J5.4 PTC1.1 Q2.1 Q2.2 Q2.3 R3.1 R16.2 U11.12 | length 10628.5
  Top Layer w14.17: U11.12@-2604.33,24.9 -2479.87,24.9 -2456.87,24.9 v1(-2442.43,10.46)
  Top Layer w15: v1(-3141.43,528.15) Q2.3@-3222.44,528.15 Q2.2@-3222.44,578.15 Q2.1@-3222.44,628.15 -3104.79,628.15 -3063.98,668.96 C29.2@-3063.98,718.5 C30.2@-3063.98,847.44 ; C14.1@-2827.76,-173.23 -2784.43,-216.56 v1(-2784.43,-219.54) ; v1(-2614.67,-219.54) -2614.67,-173.23 -2586.42,-201.48 -2490.43,-201.48 -2488.88,-199.93 -2488.88,-145.54 -2461.43,-118.09 -2461.43,6.46 -2479.87,24.9 ; PTC1.1@2011.81,423.23 2186.57,248.46 2186.57,-1675.75 J5.4@2239.17,-1728.35 2564.96,-1402.56 R3.1@2665.35,-1402.56
  Bottom Layer w15: v1(-3141.43,528.15) -3141.43,392.46 -3014.43,265.46 -2663.43,265.46 -2644.93,283.96 -2472.93,283.96 -2442.43,253.46 v1(-2442.43,10.46) -2248.91,203.97 -257.91,203.97 -1.25,460.63 507.07,460.63 562.07,515.63 1590.07,515.63 1612.57,493.13 1696.69,493.13 1780.57,577.02 1780.57,608.19 1794.07,621.69 1931.17,621.69 1956.81,596.05 2034.31,596.05 2063.99,625.73 2182.8,625.73 2189.57,618.96 2189.57,449.46 2163.35,423.23 2011.81,423.23 ; v1(-2784.43,-219.54) v1(-2614.67,-219.54)
12V0A: Q1.1 Q1.2 Q1.3 R12.2 R16.1 | length 1057.1
  Top Layer w15: Q1.1@-3004.92,-491.34 Q1.2@-3004.92,-441.34 Q1.3@-3004.92,-391.34 -2898.43,-391.34 ; R16.1@-2673.72,-173.23 -2673.72,-393.54 -2687.72,-407.54 ; R12.2@-2460.63,-173.23 -2460.63,-217.66 -2650.52,-407.54 -2687.72,-407.54 ; -2898.43,-391.34 -2882.22,-407.54 -2862.22,-407.54 ; -2898.43,-391.34 -2878.43,-391.34 -2862.22,-407.54 ; -2862.22,-407.54 -2687.72,-407.54
12V0B: D3.2 L3.1 Q2.5 Q2.6 Q2.7 Q2.8 U13.2 U13.4 | length 3383.8
  Top Layer w15: L3.1@-2761.81,375.98 -2799.43,375.98 -2841.24,417.8 -2841.24,757.46 -2723.43,875.27 -2723.43,962.46 -2724.43,963.46 -2822.43,963.46 -3019.43,766.46 -3019.43,660.53 -3031.5,648.46 Q2.8@-3031.5,628.15 Q2.7@-3031.5,578.15 Q2.6@-3031.5,528.15 Q2.5@-3031.5,478.15 -3089.43,478.15 -3119.43,448.15 -3119.43,304.96 -3175.43,248.96 -3175.43,156.46 -3156.47,137.5 -3092.65,137.5 -3012.11,56.96 -3012.11,-120.54 -3061.79,-170.23 -3061.79,-656.04 -3044.16,-673.68 D3.2@-2976.38,-673.68 -2976.38,-591.54 -2838.57,-453.74 U13.2@-2787.4,-453.74 U13.4@-2539.37,-453.74
12V0C: D2.2 J3.1 PTC1.2 Z1.1 | length 1356.4
  Top Layer w15: D2.2@1896.65,637.35 1975.93,637.35 2011.81,673.23 2041.34,643.7 Z1.1@2151.57,643.7
  Bottom Layer w15: 2011.81,673.23 2400.8,673.23 2744.31,329.72 J3.1@2943.9,329.72
12VSWITCHED: C3.1 C6.2 J5.1 J5.2 U2.1 | length 2782.6
  Top Layer w15: C3.1@478.34,-1002.95 431.57,-956.18 431.57,-625.51 C6.2@529.53,-527.56 623.57,-527.56 636.37,-540.35 U2.1@732.28,-540.35 ; J5.2@2239.17,-1397.64 J5.1@2239.17,-1232.28
  Bottom Layer w15: C3.1@478.34,-1002.95 677.93,-1202.54 801.82,-1202.54 823.57,-1180.79 863.82,-1180.79 898.57,-1215.54 1993.57,-1215.54 2010.31,-1232.28 J5.1@2239.17,-1232.28
BAT: Bat1.1 C27.2 C28.2 J5.3 R25.2 U11.10 | length 7507
  Top Layer w14.17: U11.10@-2604.33,-25.1 -2531.93,-25.1 v1(-2519.43,-37.6)
  Top Layer w15: R25.2@-2576.77,846.46 -2576.77,178.8 v1(-2567.43,169.46) ; v1(143.57,-862.54) 203.74,-802.38 ; C28.2@273.62,-372.05 273.62,-455.71 203.74,-525.59 C27.2@203.74,-575.79 203.74,-802.38 ; v1(846.57,-1238.54) 846.57,-1481.04 832.07,-1495.54 675.57,-1495.54 203.74,-1023.71 203.74,-802.38
  Bottom Layer w15: v1(-2567.43,169.46) -2567.43,80.96 -2458.93,-27.54 ; v1(-2519.43,-37.6) -2509.37,-27.54 -2458.93,-27.54 ; v1(143.57,-862.54) -961.01,-862.54 Bat1.1@-1083.66,-985.2 -1268.38,-985.2 -1768.84,-484.74 -1866.95,-484.74 -2324.15,-27.54 -2458.93,-27.54 ; v1(846.57,-1238.54) 980.57,-1372.54 2048.72,-1372.54 J5.3@2239.17,-1562.99
BAT2: Bat1.2 Bat2.1 | length 907.7
  Bottom Layer w15: Bat2.1@-1990.16,1887.76 -1538.43,1887.76 -1535.47,1884.8 Bat1.2@-1083.66,1884.8
BAT3: Bat2.2 Bat3.1 | length 731.9
  Top Layer w15: Bat3.1@-2321.81,-1576.77 -1990.16,-1245.12 Bat2.2@-1990.16,-982.24
CAN1H: J1.2 J2.2 U1.7 | length 2196.7
  Top Layer w15: J1.2@-361.22,1683.07 -282.84,1761.46 19.07,1761.46 33.44,1747.09 33.44,1430.59 38.44,1425.59 U1.7@107.28,1425.59
  Bottom Layer w15: J1.2@-361.22,1683.07 -620.77,1423.52 -620.77,1342.19 -619.43,1340.85 -538.32,1340.85 -536.71,1342.46 -536.71,1391.17 -502.98,1424.9 -342.87,1424.9 -324.43,1406.46 -324.43,1332.46 -385.43,1271.46 -385.43,951.37 J2.2@-332.68,898.62
CAN1L: J1.3 J2.3 U1.6 | length 1506.9
  Top Layer w15: J1.3@-195.87,1899.6 -122.02,1973.46 79.57,1973.46 80.57,1972.46 80.57,1816.46 53.44,1789.32 53.44,1452.46 55.44,1450.46 160.57,1450.46 161.57,1449.46 161.57,1376.59 160.57,1375.59 U1.6@107.28,1375.59 33.91,1375.59 33.44,1375.12 33.44,1291.82 -50.43,1207.96 -74.52,1207.96 J2.3@-167.32,1115.16